# Altium PCB mux_lowside-V1_00.PcbDoc
Units mil, origin at the board's own origin, x right, y up, seen from the top; angles counter-clockwise.
Board outline 3937.01 x 3937.01 mil, 2 copper layers (Top Layer, Bottom Layer), stack 12.8 mil thick; 44 components, 90 nets, 270 pads, 149 vias.
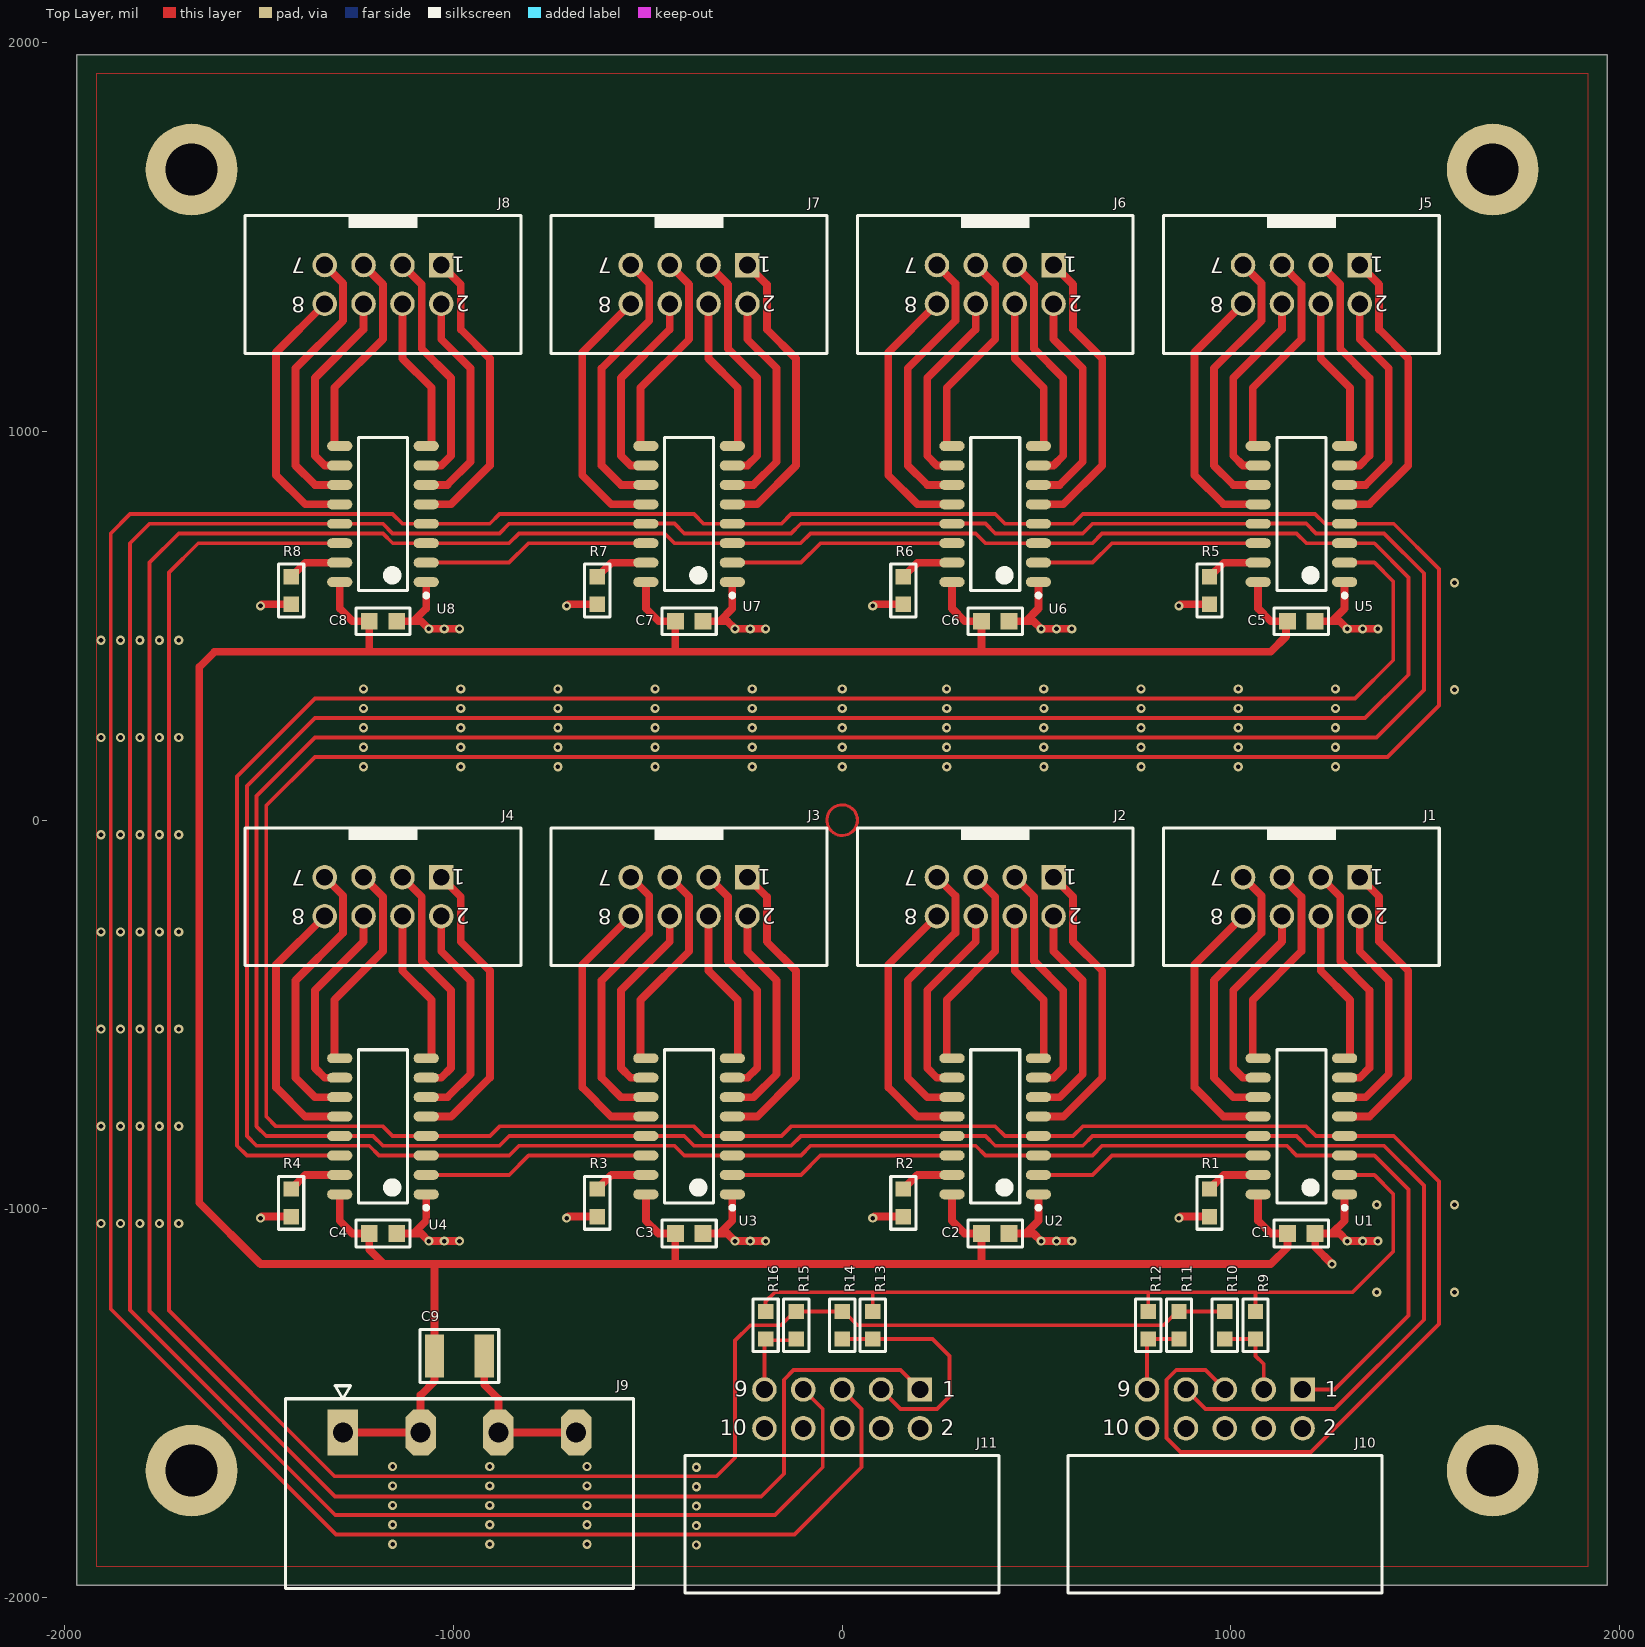
[diagram p0: Top Layer view]
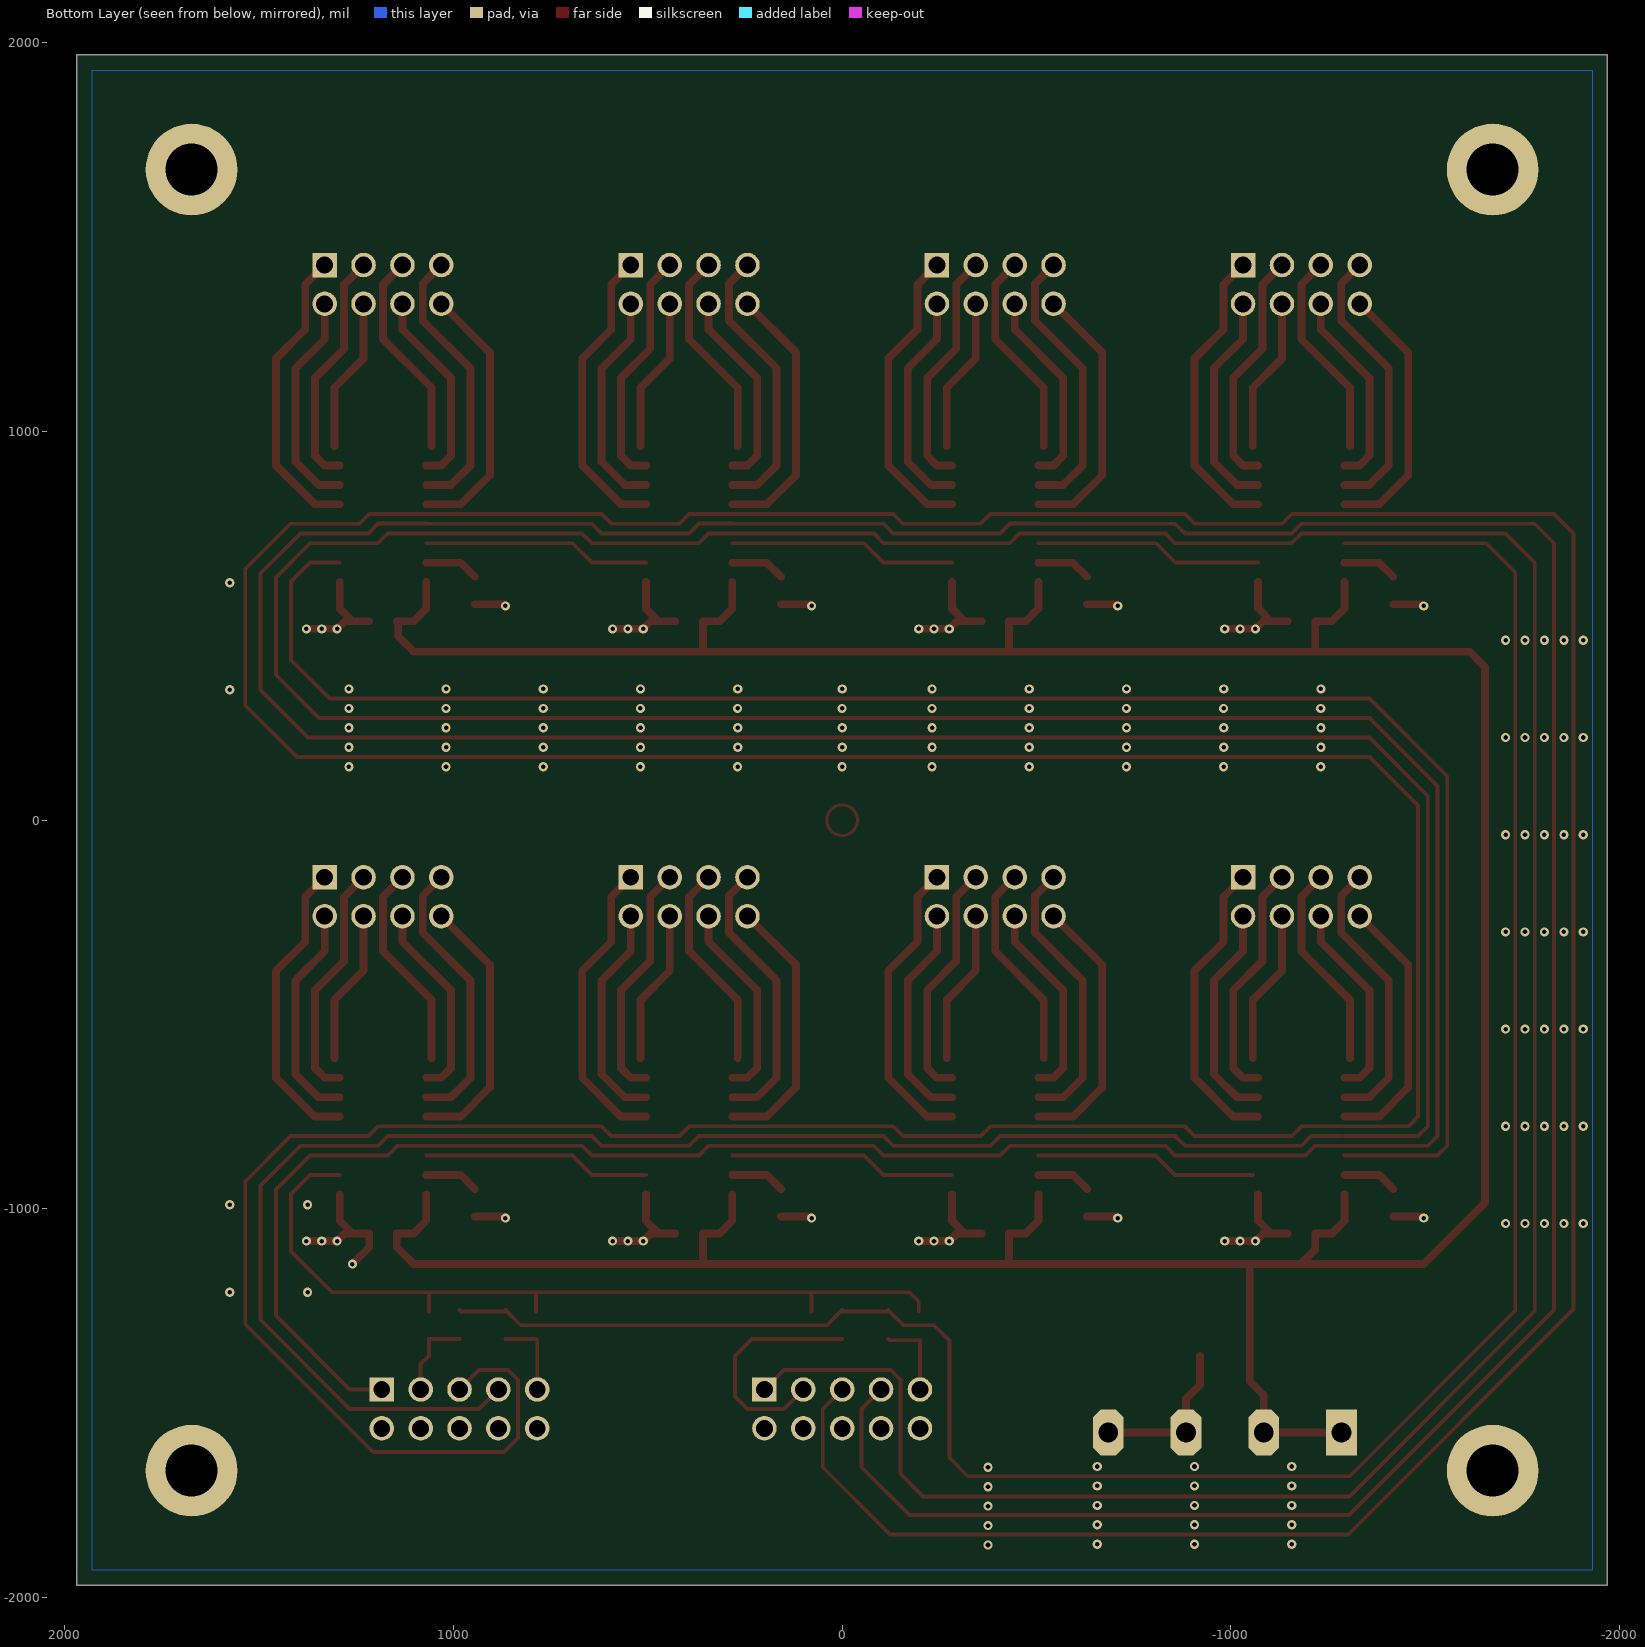
[diagram p1: Bottom Layer view, seen from below]
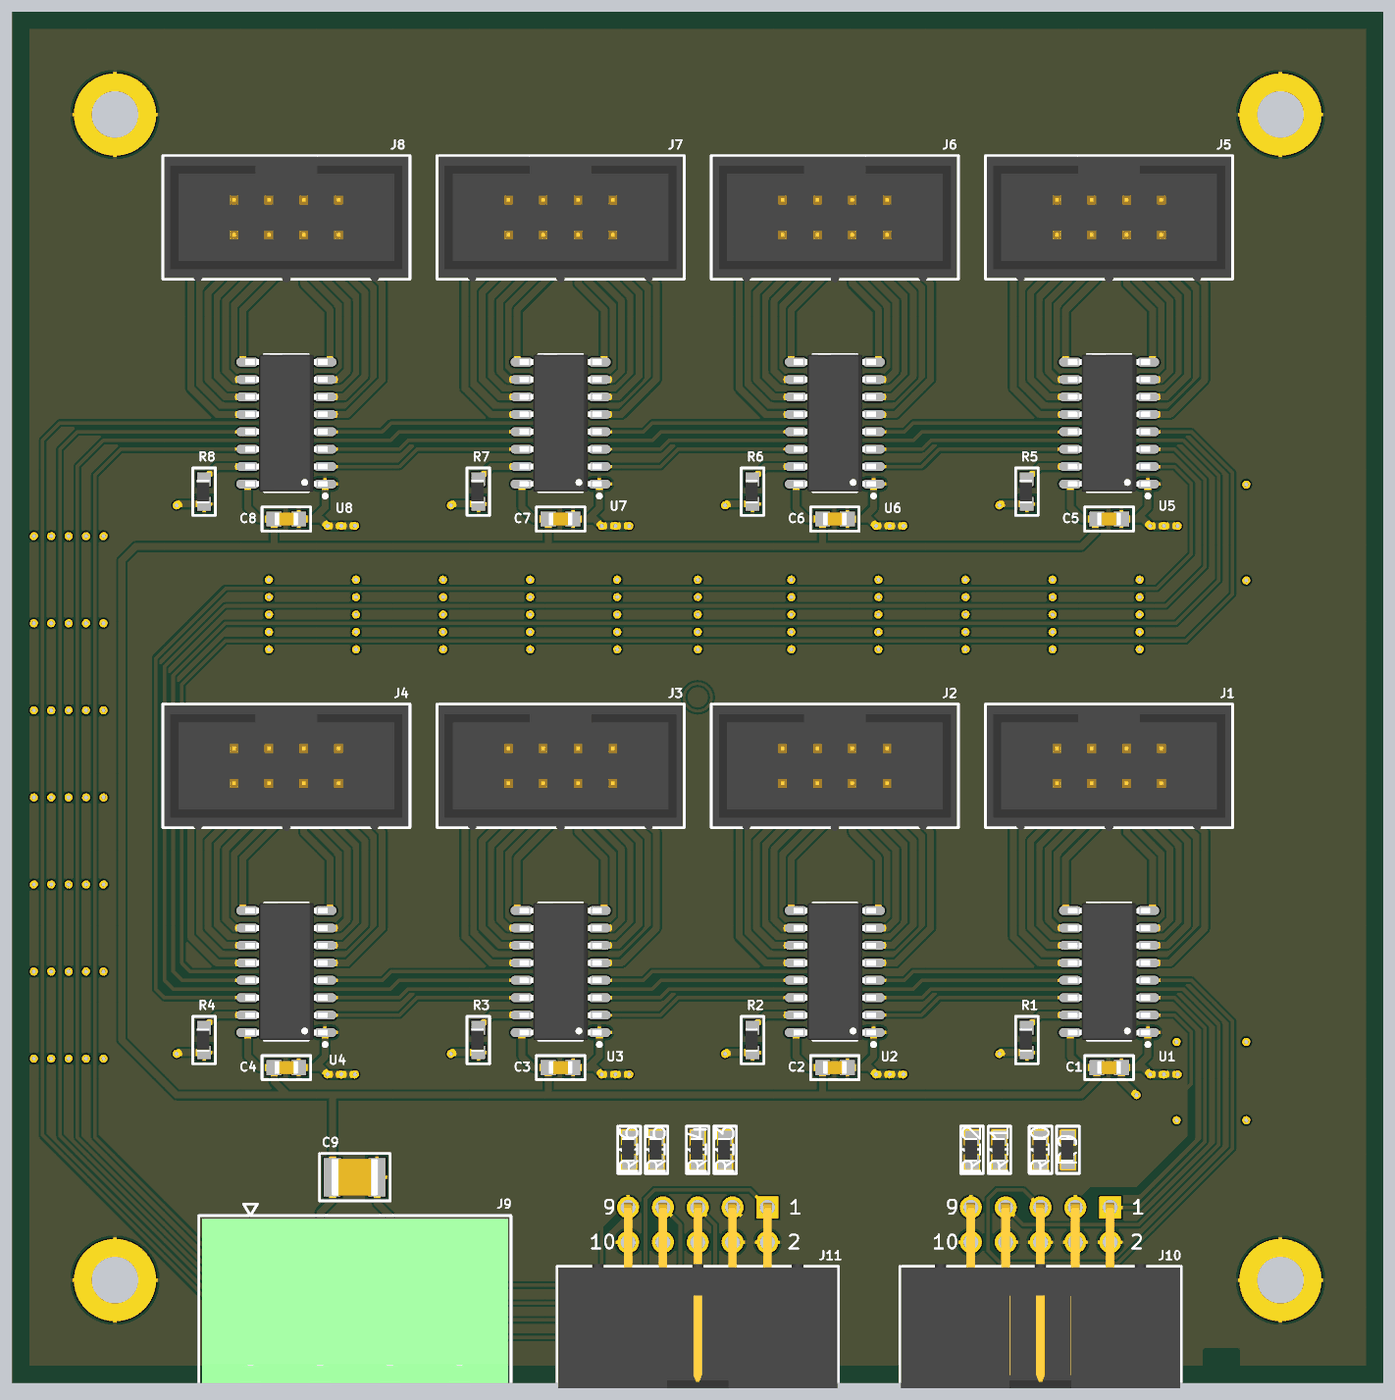
[diagram p2: 3D render of the assembled board from above, using the file's embedded part models]

## Layer stack, top to bottom
Top Solder: solder mask 0.4, Solder Resist, Dk 3.5
Top Layer: signal copper 1.4
Dielectric 1: core 10, FR-4, Dk 4.2
Bottom Layer: signal copper 1.4
Bottom Solder: solder mask 0.4, Solder Resist, Dk 3.5

## Board outline
-1968.5,-1968.5 -1968.5,1968.5 1968.5,1968.5 1968.5,-1968.5

## Design rules (kind name [scope] priority, off if disabled: settings)
Clearance [All] p1: gap=5.98 ignorepadtopadclearanceinfootprint=FALSE
ComponentClearance ComponentClearance_LayerNumbers [All vs TouchesRoom('LayerNumbers')] p1: gap=0 collisioncheckmode=3 verticalgap=0 showdistances=FALSE
ComponentClearance [All] p2: gap=10 collisioncheckmode=3 verticalgap=10 showdistances=FALSE
HoleSize [All] p1: absolutevalues=TRUE maxlimit=255.91 minlimit=11.81 maxpercent=80.000 minpercent=20.000
MinimumSolderMaskSliver [All] p1: minsoldermaskwidth=5.91
PlaneConnect [All] p1: pad.planeconnectstyle=Relief pad.reliefexpansion=20 pad.reliefentries=4 pad.reliefconductorwidth=10 pad.reliefairgap=10 via.planeconnectstyle=Direct via.reliefexpansion=20 via.reliefentries=4 via.reliefconductorwidth=10 via.reliefairgap=10
PolygonConnect [All] p1: thpad.connectstyle=Relief thpad.reliefconductorwidth=10 thpad.reliefentries=4 thpad.polygonreliefangle="90 Angle" thpad.airgapwidth=10 smdpad.connectstyle=Relief smdpad.reliefconductorwidth=10 smdpad.reliefentries=4 smdpad.polygonreliefangle="90 Angle" smdpad.airgapwidth=10 via.connectstyle=Direct via.reliefconductorwidth=10 via.reliefentries=4 via.polygonreliefangle="90 Angle" via.airgapwidth=10
RoutingVias [All] p1: holewidth=15.75 width=31.5 viastyle="Through Hole" minholewidth=11.81 minwidth=23.62 maxholewidth=64.96 maxwidth=49.21
SilkToSolderMaskClearance [IsPad] p1: minsilkscreentomaskgap=5.91 clearancetoexposedcopper=TRUE
SolderMaskExpansion [All] p1: expansion=4
UnRoutedNet [All] p1: checkbadconnections=TRUE
Width [All] p1: maxlimit=20 minlimit=6 preferedwidth=10
24 further rules are at their usual default settings.

## Components (designator, comment, footprint, x,y, rotation, side; value= is the part's Value field where it differs from the comment)
C1 "Capacitor" CAPC1608X10M_SILK 1181.1,-1062.99 r180 top
C2 "Capacitor" CAPC1608X10M_SILK 393.7,-1062.99 r180 top
C3 "Capacitor" CAPC1608X10M_SILK -393.7,-1062.99 r180 top
C4 "Capacitor" CAPC1608X10M_SILK -1181.1,-1062.99 r180 top
C5 "Capacitor" CAPC1608X10M_SILK 1181.1,511.81 r180 top
C6 "Capacitor" CAPC1608X10M_SILK 393.7,511.81 r180 top
C7 "Capacitor" CAPC1608X10M_SILK -393.7,511.81 r180 top
C8 "Capacitor" CAPC1608X10M_SILK -1181.1,511.81 r180 top
C9 "Capacitor" CAPC3225X17M_SILK -984.64,-1377.95 r180 top
J1 "Header" 61200821621 1181.1,-196.85 r180 top
J2 "Header" 61200821621 393.7,-196.85 r180 top
J3 "Header" 61200821621 -393.7,-196.85 r180 top
J4 "Header" 61200821621 -1181.1,-196.85 r180 top
J5 "Header" 61200821621 1181.1,1377.95 r180 top
J6 "Header" 61200821621 393.7,1377.95 r180 top
J7 "Header" 61200821621 -393.7,1377.95 r180 top
J8 "Header" 61200821621 -1181.1,1377.95 r180 top
J9 "MSTBA 2,5/ 4-G-5,08" 1757268 -984.25,-1732.28 r0 top
J10 "Header" 61201021721 984.25,-1811.02 r0 top
J11 "Header" 61201021721 0,-1811.02 r0 top
R1 "Resistor" RESC1608X06M_SILK 944.88,-984.25 r270 top value=330
R2 "Resistor" RESC1608X06M_SILK 157.48,-984.25 r270 top value=330
R3 "Resistor" RESC1608X06M_SILK -629.92,-984.25 r270 top value=330
R4 "Resistor" RESC1608X06M_SILK -1417.32,-984.25 r270 top value=330
R5 "Resistor" RESC1608X06M_SILK 944.88,590.55 r270 top value=330
R6 "Resistor" RESC1608X06M_SILK 157.48,590.55 r270 top value=330
R7 "Resistor" RESC1608X06M_SILK -629.92,590.55 r270 top value=330
R8 "Resistor" RESC1608X06M_SILK -1417.32,590.55 r270 top value=330
R9 "Resistor" RESC1608X06M_SILK 1062.99,-1299.21 r270 top value=0
R10 "Resistor" RESC1608X06M_SILK 984.25,-1299.21 r270 top value=0
R11 "Resistor" RESC1608X06M_SILK 866.14,-1299.21 r270 top value=0
R12 "Resistor" RESC1608X06M_SILK 787.4,-1299.21 r270 top value=0
R13 "Resistor" RESC1608X06M_SILK 78.74,-1299.21 r270 top value=0
R14 "Resistor" RESC1608X06M_SILK 0,-1299.21 r270 top value=0
R15 "Resistor" RESC1608X06M_SILK -118.11,-1299.21 r270 top value=0
R16 "Resistor" RESC1608X06M_SILK -196.85,-1299.21 r270 top value=0
U1 "TLC5916IDR" SOIC127P600X175-16M 1181.1,-787.4 r180 top
U2 "TLC5916IDR" SOIC127P600X175-16M 393.7,-787.4 r180 top
U3 "TLC5916IDR" SOIC127P600X175-16M -393.7,-787.4 r180 top
U4 "TLC5916IDR" SOIC127P600X175-16M -1181.1,-787.4 r180 top
U5 "TLC5916IDR" SOIC127P600X175-16M 1181.1,787.4 r180 top
U6 "TLC5916IDR" SOIC127P600X175-16M 393.7,787.4 r180 top
U7 "TLC5916IDR" SOIC127P600X175-16M -393.7,787.4 r180 top
U8 "TLC5916IDR" SOIC127P600X175-16M -1181.1,787.4 r180 top

## Footprints (in the part's own frame and the unit in brackets; to place one, negate y for a bottom-side part, rotate by r counter-clockwise, add the part's x,y. Pads: shape width x height; smd on the part's side, far side on the other; paste and mask are expansions set on the pad)
1757268 [mm] "MSTBA 2,5/ 4-G-5,08"
  rect 2x3 hole 1.3: 1(-7.62,4)
  oct 2x3 hole 1.3: 2(-2.54,4) 3(2.54,4) 4(7.62,4)
  silkscreen extent -11.38,-6.2 11.38,7.05, body extent -11.16,-6 11.16,6, height 8.65
61200821621 [mm] "8 pins, straight, gold plating"
  rect 1.6x1.6 hole 1.1: 1(-3.81,-1.27)
  round 1.6 hole 1.1: 2(-3.81,1.27) 3(-1.27,-1.27) 4(-1.27,1.27) 5(1.27,-1.27) 6(1.27,1.27) 7(3.81,-1.27) 8(3.81,1.27)
  silkscreen extent -9.01,-4.5 9.01,4.5, body extent -8.91,-4.42 8.91,4.75, height 9.13
61201021721 [mm] "10 pins, right angled, gold plating"
  rect 1.6x1.6 hole 1.1: 1(5.08,8.805)
  round 1.6 hole 1.1: 2(5.08,6.265) 3(2.54,8.805) 4(2.54,6.265) 5(0,8.805) 6(0,6.265) 7(-2.54,8.805) 8(-2.54,6.265) 9(-5.08,8.805) 10(-5.08,6.265)
  silkscreen extent -10.26,-4.5 10.26,4.5, body extent -10.18,-4.42 10.18,9.13, height 9.23
CAPC1608X10M_SILK [mm] "Capacitor 0603, low density, silk outline"
  rect 1.1x1.1 smd: 1(-0.9,0) 2(0.9,0)
  silkscreen extent -1.78,-0.87 1.78,0.87, body extent -0.87,-0.48 0.87,0.48, height 1
CAPC3225X17M_SILK [mm] "Capacitor 1210, low density, silk outline"
  rect 1.25x2.8 smd: 1(-1.625,0) 2(1.625,0)
  silkscreen extent -2.58,-1.73 2.58,1.73, body extent -1.7,-1.35 1.7,1.35, height 1.7
RESC1608X06M_SILK [mm] "Resistor 0603 Low Density, Silkscreen Outline"
  rect 1x1 smd: 1(-0.9,0) 2(0.9,0)
  silkscreen extent -1.73,-0.82 1.73,0.82, body extent -0.85,-0.52 0.85,0.38, height 0.55
SOIC127P600X175-16M [mm] "SOIC, 16-Leads, Body 9,90x3,90mm, Pitch 1,27mm, IPC Low Density"
  oval 1.65x0.65 smd: 1(-2.825,4.445) 2(-2.825,3.175) 3(-2.825,1.905) 4(-2.825,0.635) 5(-2.825,-0.635) 6(-2.825,-1.905) 7(-2.825,-3.175) 8(-2.825,-4.445) 9(2.825,-4.445) 10(2.825,-3.175) 11(2.825,-1.905) 12(2.825,-0.635) 13(2.825,0.635) 14(2.825,1.905) 15(2.825,3.175) 16(2.825,4.445)
  silkscreen extent -2.95,-5 1.6,5.44, body extent -3,-5 3,5, height 1.75

## Part data
C1 C2 C3 C4 C5 C6 C7 C8: library part 11026540, "CAP nF100   50V 0603 X7R 10%", Capacity=100nF, Manufacturer=Samsung, Manufacturer Number=CL10B104KB8NNNC, Max. Voltage=50V, package=0603, Temp. Range="-55 .. 125°C", Tolerance=10%, Part Number=11026540, Pin Count=2, RoHS=yes, SAP-Nr.=11026540, SMD=yes, Technology=X7R
C9: library part 10159411, "CAP uF  4.7 50V 1210 X7R 10%", Capacity=4.7uF, Manufacturer=Samsung, Manufacturer Number=CL21A475KPFNNNE, Max. Voltage=50V, package=1210, Temp. Range="-55 .. 125°C", Tolerance=10%, Part Number=10159411, Pin Count=2, RoHS=yes, SAP-Nr.=10159411, SMD=yes, Technology=X7R
J1 J2 J3 J4 J5 J6 J7 J8: library part 61200821621, "Box Header Male THT 2.54mm straight 8pos", Manufacturer=Wuerth, Max. Current=3A, Max. Voltage=250V, Supplier Part Number 1=732-5395-ND, Temp. Range="-40 to 125°C", Manufacturer Number=61200821621, Nr. of positions=8, Part Number=61200821621, Pin Count=8, RoHS=yes, SMD=no, Supplier 1=Digikey, Type="Header Male"
J9: "PCB Header, 2.54mm, angled, 4pol", Manufacturer="Phoenix Contact", Manufacturer Number=1757268, Max. Current=15A, Max. Voltage=250V, Supplier Part Number 1=277-1108-ND, Information=5.08mm, Nr. of positions=4, Part Number="MSTBA 2,5/ 4-G-5,08", Pin Count=4, RoHS=yes, SMD=No, Supplier 1=Digikey, Type=Connector
J10 J11: library part 61201021721, "Box Header Male THT 2.54mm angled 10pos", Manufacturer=Wuerth, Max. Current=3A, Max. Voltage=250V, Supplier Part Number 1=732-2098-ND, Temp. Range="-40 to 125°C", Manufacturer Number=61201021721, Nr. of positions=10, Part Number=61201021721, Pin Count=10, RoHS=yes, SMD=no, Supplier 1=Digikey, Type="Header Male"
R1 R2 R3 R4 R5 R6 R7 R8: library part RES_330_0603, "Resistor 330 1% 0603", Manufacturer=Yaego, Manufacturer Number=RC0603FR-07330RL, package=0603, Power Dissipation=100mW, Temp. Range="-50°C to 150°C", Tolerance=1%, Part Number=RES_330_0603, Pin Count=2, RoHS=yes, SMD=yes, Technology="thick film"
R9 R10 R11 R12 R13 R14 R15 R16: library part RES_0_0603, "Resistor 0 1% 0603", Manufacturer=Yaego, Manufacturer Number=RC0603JR-070RL, package=0603, Power Dissipation=100mW, Temp. Range="-50°C to 150°C", Tolerance=1%, Part Number=RES_0_0603, Pin Count=2, RoHS=yes, SMD=yes, Technology="thick film"
U1 U2 U3 U4 U5 U6 U7 U8: "TLC5916IDR 8 channel LED Const. Current Sink Driver", Manufacturer="Texas Instruments", package=SOIC-16, Supplier Part Number 1=296-22710-1-ND, Temp. Range=-40..+125°C, Information 1="8 Channel, serial input", Information 2="3-5V; 120mA", Manufacturer Number=TLC5916IDR, Part Number=TLC5916IDR, Pin Count=16, RoHS=yes, SMD=yes, Supplier 1=Digikey, Type=LED-Driver

## Free pads (board coordinates)
  round 236.22 hole 133.86: ""(-1673.23,-1673.23) ""(-1673.23,1673.23) ""(1673.23,-1673.23) ""(1673.23,1673.23)

## Via types
v1: diameter 23.62, hole 11.81, Top Layer to Bottom Layer, 149 vias

## Nets (pads, with @x,y where several pads share a name; then routed paths per layer and width w, separated by ;. In a path a pad name is that pad's centre, name@x,y a point inside that pad or via, vN(x,y) a via of type N, cw(c..) or ccw(c..) an arc to the next point about the centre after c; other vN are vias at no path point)
CLK: J10.1 J11.1 U1.3 U2.3 U3.3 U4.3 U5.3 U6.3 U7.3 U8.3 | length 15819.1
  Top Layer w10: J11.1 150,-1414.37 -125,-1414.37 -150,-1439.37 -150,-1681.1 -208.27,-1739.37 -1304.53,-1739.37 -1781.5,-1262.4 -1781.5,662.4 -1706.3,737.6 -1181.3,737.6 -1156.1,712.4 U8.3 -856.5,712.4 -831.3,737.6 -456.3,737.6 -431.1,712.4 U7.3 -106.69,712.4 -81.5,737.6 343.7,737.6 368.9,712.4 U6.3 643.5,712.4 668.7,737.6 1168.7,737.6 1193.9,712.4 U5.3 1368.7,712.4 1368.7,712.2 1456.69,624.21 1456.69,374.02 1345.28,262.6 -1356.3,262.6 -1531.3,87.6 -1531.3,-812.4 -1506.3,-837.4 -1216.54,-837.4 -1191.54,-862.4 U4.3 -856.3,-862.4 -831.3,-837.4 -431.3,-837.4 -406.3,-862.4 U3.3 -106.3,-862.4 -81.3,-837.4 343.7,-837.4 368.7,-862.4 U2.3 643.7,-862.4 668.7,-837.4 1143.7,-837.4 1168.7,-862.4 U1.3 1368.7,-862.4 1456.69,-950.39 1456.69,-1274.41 1266.73,-1464.37 J10.1
GND: C1.1 C2.1 C3.1 C4.1 C5.1 C6.1 C7.1 C8.1 C9.1 J9.3 J9.4 J10.2 J10.4 J10.6 J10.8 J10.10 J11.2 J11.4 J11.6 J11.8 J11.10 pad. R1.2 R2.2 R3.2 R4.2 R5.2 R6.2 R7.2 R8.2 U1.1 U2.1 U3.1 U4.1 U5.1 U6.1 U7.1 U8.1 | length 3723.3
  Top Layer w20: v1(-1496.07,-1023.63) -1492.13,-1019.68 R4.2 ; v1(-1496.07,551.18) -1492.12,555.12 R8.2 ; U4.1 -1069.88,-1030.51 -1102.36,-1062.99 ; U8.1 -1069.88,544.68 -1102.75,511.81 C8.1 -1102.36,511.81 -1082.67,511.81 v1(-1062.99,492.13) v1(-1023.62,492.13) v1(-984.25,492.13) ; v1(-984.25,-1082.68) v1(-1023.62,-1082.68) v1(-1062.99,-1082.68) -1082.67,-1063 -1102.36,-1063 ; C9.1 -920.67,-1451.77 -884.25,-1488.19 J9.3 J9.4 ; v1(-708.66,-1023.63) -704.72,-1019.68 R3.2 ; v1(-708.66,551.18) -704.72,555.12 R7.2 ; U3.1 -282.48,-1030.51 -314.96,-1062.99 ; U7.1 -282.48,544.49 -315.15,511.81 C7.1 -314.96,511.81 -295.27,511.81 v1(-275.59,492.13) v1(-236.22,492.13) v1(-196.85,492.13) ; v1(-196.85,-1082.68) v1(-236.22,-1082.68) v1(-275.59,-1082.68) -295.27,-1063 -314.96,-1063 ; v1(78.74,-1023.63) 82.68,-1019.68 R2.2 ; v1(78.74,551.18) 82.68,555.12 R6.2 ; C6.1 472.44,511.81 ; U2.1 504.92,-1030.51 472.44,-1062.99 ; U6.1 504.92,544.29 472.44,511.81 ; v1(590.55,-1082.68) v1(551.18,-1082.68) v1(511.81,-1082.68) 492.13,-1063 472.44,-1063 ; v1(590.55,492.13) v1(551.18,492.13) v1(511.81,492.13) 492.13,511.81 472.44,511.81 ; v1(866.14,-1023.63) 870.08,-1019.68 R1.2 ; v1(866.14,551.18) 870.08,555.12 R5.2 ; v1(1259.84,-1141.74) 1216.54,-1098.43 C1.1 ; U1.1 1292.32,-1030.51 1259.84,-1062.99 ; U5.1 1292.32,544.29 1259.85,511.81 C5.1 1259.84,511.81 1279.53,511.81 v1(1299.21,492.13) v1(1338.58,492.13) v1(1377.95,492.13) ; v1(1377.95,-1082.68) v1(1338.58,-1082.68) v1(1299.21,-1082.68) 1279.53,-1063 1259.84,-1063 ; -1102.36,-1063 C4.1 -1102.36,-1062.99 ; -314.96,-1063 C3.1 -314.96,-1062.99 ; 472.44,-1063 C2.1 472.44,-1062.99 ; C1.1 1259.84,-1063 ; C1.1 1259.84,-1062.99
  other v1: -375,-1864.37 -1156.3,-1862.4 -906.3,-1862.4 -656.3,-1862.4 -375,-1814.37 -1156.3,-1812.4 -906.3,-1812.4 -656.3,-1812.4 -375,-1764.37 -1156.3,-1762.4 -906.3,-1762.4 -656.3,-1762.4 -375,-1714.37 -1156.3,-1712.4 -906.3,-1712.4 -656.3,-1712.4 -375,-1664.37 -1156.3,-1662.4 -906.3,-1662.4 -656.3,-1662.4
LE: J10.5 J11.5 U1.4 U2.4 U3.4 U4.4 U5.4 U6.4 U7.4 U8.4 | length 16989.6
  Top Layer w10: J11.5 50,-1514.37 50,-1664.37 -123.03,-1837.4 -1301.57,-1837.4 -1881.3,-1257.68 -1881.3,737.6 -1831.3,787.6 -1156.5,787.6 -1131.3,762.4 U8.4 -906.5,762.4 -881.3,787.6 -381.5,787.6 -356.3,762.4 U7.4 -156.5,762.4 -131.5,787.4 393.7,787.4 418.7,762.4 U6.4 593.7,762.4 618.7,787.4 618.7,787.6 1216.54,787.6 1241.73,762.4 U5.4 1418.7,762.4 1535.43,645.67 1535.43,295.28 1402.76,162.6 -1356.3,162.6 -1481.3,37.6 -1481.3,-762.4 -1456.3,-787.4 -1181.3,-787.4 -1156.3,-812.4 U4.4 -906.3,-812.4 -881.3,-787.4 -381.3,-787.4 -356.3,-812.4 U3.4 -156.3,-812.4 -131.3,-787.4 393.7,-787.4 418.7,-812.4 U2.4 593.7,-812.4 618.7,-787.4 1193.7,-787.4 1218.7,-812.4 U1.4 1418.7,-812.4 1535.43,-929.13 1535.43,-1295.67 1206.1,-1625 869.88,-1625 834.25,-1589.37 834.25,-1439.37 859.25,-1414.37 934.25,-1414.37 J10.5
LED0: J1.1 U1.5 | length 772.5
  Top Layer w20: U1.5 1356.1,-762.4 1456.1,-662.4 1456.1,-387.4 1381.1,-312.4 1381.1,-196.85 J1.1
LED1: J1.2 U1.6 | length 575.7
  Top Layer w20: U1.6 1346.79,-712.4 1406.1,-653.09 1406.1,-412.4 1331.1,-337.4 J1.2
LED2: J1.3 U1.7 | length 616.5
  Top Layer w20: J1.3 1281.1,-196.85 1281.1,-362.4 1356.1,-437.4 1356.1,-637.4 1331.1,-662.4 U1.7
LED3: J1.4 U1.8 | length 396.6
  Top Layer w20: J1.4 1231.1,-387.4 1306.1,-462.4 U1.8@1306.1,-612.4
LED4: J1.5 U1.9 | length 547.5
  Top Layer w20: U1.9@1056.1,-612.4 1056.1,-462.4 1181.1,-337.4 1181.1,-196.85 J1.5 J1.5@1131.1,-137.4
LED5: J1.6 U1.10 | length 516.5
  Top Layer w20: U1.10 1031.1,-662.4 1006.1,-637.4 1006.1,-437.4 1131.1,-312.4 J1.6
LED6: J1.7 U1.11 | length 720.4
  Top Layer w20: J1.7 1078.58,-194.33 1078.58,-289.92 956.1,-412.4 956.1,-662.4 1006.1,-712.4 U1.11
LED7: J1.8 U1.12 | length 696.6
  Top Layer w20: J1.8@1031.1,-237.4 J1.8 906.1,-371.85 906.1,-687.4 981.1,-762.4 U1.12
LED8: J2.1 U2.5 | length 772.5
  Top Layer w20: U2.5 568.7,-762.4 668.7,-662.4 668.7,-387.4 593.7,-312.4 593.7,-196.85 J2.1
LED9: J2.2 U2.6 | length 575.7
  Top Layer w20: U2.6 559.39,-712.4 618.7,-653.09 618.7,-412.4 543.7,-337.4 J2.2
LED10: J2.3 U2.7 | length 616.5
  Top Layer w20: J2.3 493.7,-196.85 493.7,-362.4 568.7,-437.4 568.7,-637.4 543.7,-662.4 U2.7
LED11: J2.4 U2.8 | length 396.6
  Top Layer w20: J2.4 443.7,-387.4 518.7,-462.4 U2.8@518.7,-612.4
LED12: J2.5 U2.9 | length 547.5
  Top Layer w20: U2.9@268.7,-612.4 268.7,-462.4 393.7,-337.4 393.7,-196.85 J2.5 J2.5@343.7,-137.4
LED13: J2.6 U2.10 | length 516.5
  Top Layer w20: U2.10 243.7,-662.4 218.7,-637.4 218.7,-437.4 343.7,-312.4 J2.6
LED14: J2.7 U2.11 | length 720.4
  Top Layer w20: J2.7 291.18,-194.33 291.18,-289.92 168.7,-412.4 168.7,-662.4 218.7,-712.4 U2.11
LED15: J2.8 U2.12 | length 696.6
  Top Layer w20: J2.8@243.7,-237.4 J2.8 118.7,-371.85 118.7,-687.4 193.7,-762.4 U2.12
LED16: J3.1 U3.5 | length 772.5
  Top Layer w20: U3.5 -218.7,-762.4 -118.7,-662.4 -118.7,-387.4 -193.7,-312.4 -193.7,-196.85 J3.1
LED17: J3.2 U3.6 | length 575.7
  Top Layer w20: U3.6 -228.02,-712.4 -168.7,-653.09 -168.7,-412.4 -243.7,-337.4 J3.2
LED18: J3.3 U3.7 | length 616.5
  Top Layer w20: J3.3 -293.7,-196.85 -293.7,-362.4 -218.7,-437.4 -218.7,-637.4 -243.7,-662.4 U3.7
LED19: J3.4 U3.8 | length 396.6
  Top Layer w20: J3.4 -343.7,-387.4 -268.7,-462.4 U3.8@-268.7,-612.4
LED20: J3.5 U3.9 | length 547.5
  Top Layer w20: U3.9@-518.7,-612.4 -518.7,-462.4 -393.7,-337.4 -393.7,-196.85 J3.5 J3.5@-443.7,-137.4
LED21: J3.6 U3.10 | length 516.5
  Top Layer w20: U3.10 -543.7,-662.4 -568.7,-637.4 -568.7,-437.4 -443.7,-312.4 J3.6
LED22: J3.7 U3.11 | length 720.4
  Top Layer w20: J3.7 -496.22,-194.33 -496.22,-289.92 -618.7,-412.4 -618.7,-662.4 -568.7,-712.4 U3.11
LED23: J3.8 U3.12 | length 696.6
  Top Layer w20: J3.8@-543.7,-237.4 J3.8 -668.7,-371.85 -668.7,-687.4 -593.7,-762.4 U3.12
LED24: J4.1 U4.5 | length 772.5
  Top Layer w20: U4.5 -1006.1,-762.4 -906.1,-662.4 -906.1,-387.4 -981.1,-312.4 -981.1,-196.85 J4.1
LED25: J4.2 U4.6 | length 575.7
  Top Layer w20: U4.6 -1015.42,-712.4 -956.1,-653.09 -956.1,-412.4 -1031.1,-337.4 J4.2
LED26: J4.3 U4.7 | length 616.5
  Top Layer w20: J4.3 -1081.1,-196.85 -1081.1,-362.4 -1006.1,-437.4 -1006.1,-637.4 -1031.1,-662.4 U4.7
LED27: J4.4 U4.8 | length 396.6
  Top Layer w20: J4.4 -1131.1,-387.4 -1056.1,-462.4 U4.8@-1056.1,-612.4
LED28: J4.5 U4.9 | length 547.5
  Top Layer w20: U4.9@-1306.1,-612.4 -1306.1,-462.4 -1181.1,-337.4 -1181.1,-196.85 J4.5 J4.5@-1231.1,-137.4
LED29: J4.6 U4.10 | length 516.5
  Top Layer w20: U4.10 -1331.1,-662.4 -1356.1,-637.4 -1356.1,-437.4 -1231.1,-312.4 J4.6
LED30: J4.7 U4.11 | length 720.4
  Top Layer w20: J4.7 -1283.62,-194.33 -1283.62,-289.92 -1406.1,-412.4 -1406.1,-662.4 -1356.1,-712.4 U4.11
LED31: J4.8 U4.12 | length 696.6
  Top Layer w20: J4.8@-1331.1,-237.4 J4.8 -1456.1,-371.85 -1456.1,-687.4 -1381.1,-762.4 U4.12
LED32: J5.1 U5.5 | length 772.5
  Top Layer w20: U5.5 1356.1,812.4 1456.1,912.4 1456.1,1187.4 1381.1,1262.4 1381.1,1377.95 J5.1
LED33: J5.2 U5.6 | length 575.7
  Top Layer w20: U5.6 1346.79,862.4 1406.1,921.72 1406.1,1162.4 1331.1,1237.4 J5.2
LED34: J5.3 U5.7 | length 616.5
  Top Layer w20: J5.3 1281.1,1377.95 1281.1,1212.4 1356.1,1137.4 1356.1,937.4 1331.1,912.4 U5.7
LED35: J5.4 U5.8 | length 396.6
  Top Layer w20: J5.4 1231.1,1187.4 1306.1,1112.4 U5.8@1306.1,962.4
LED36: J5.5 U5.9 | length 547.5
  Top Layer w20: U5.9@1056.1,962.4 1056.1,1112.4 1181.1,1237.4 1181.1,1377.95 J5.5 J5.5@1131.1,1437.4
LED37: J5.6 U5.10 | length 516.5
  Top Layer w20: U5.10 1031.1,912.4 1006.1,937.4 1006.1,1137.4 1131.1,1262.4 J5.6
LED38: J5.7 U5.11 | length 720.4
  Top Layer w20: J5.7 1078.58,1380.47 1078.58,1284.88 956.1,1162.4 956.1,912.4 1006.1,862.4 U5.11
LED39: J5.8 U5.12 | length 696.6
  Top Layer w20: J5.8@1031.1,1337.4 J5.8 906.1,1202.95 906.1,887.4 981.1,812.4 U5.12
LED40: J6.1 U6.5 | length 772.5
  Top Layer w20: U6.5 568.7,812.4 668.7,912.4 668.7,1187.4 593.7,1262.4 593.7,1377.95 J6.1
LED41: J6.2 U6.6 | length 575.7
  Top Layer w20: U6.6 559.39,862.4 618.7,921.72 618.7,1162.4 543.7,1237.4 J6.2
LED42: J6.3 U6.7 | length 616.5
  Top Layer w20: J6.3 493.7,1377.95 493.7,1212.4 568.7,1137.4 568.7,937.4 543.7,912.4 U6.7
LED43: J6.4 U6.8 | length 396.6
  Top Layer w20: J6.4 443.7,1187.4 518.7,1112.4 U6.8@518.7,962.4
LED44: J6.5 U6.9 | length 547.5
  Top Layer w20: U6.9@268.7,962.4 268.7,1112.4 393.7,1237.4 393.7,1377.95 J6.5 J6.5@343.7,1437.4
LED45: J6.6 U6.10 | length 516.5
  Top Layer w20: U6.10 243.7,912.4 218.7,937.4 218.7,1137.4 343.7,1262.4 J6.6
LED46: J6.7 U6.11 | length 720.4
  Top Layer w20: J6.7 291.18,1380.47 291.18,1284.88 168.7,1162.4 168.7,912.4 218.7,862.4 U6.11
LED47: J6.8 U6.12 | length 696.6
  Top Layer w20: J6.8@243.7,1337.4 J6.8 118.7,1202.95 118.7,887.4 193.7,812.4 U6.12
LED48: J7.1 U7.5 | length 772.5
  Top Layer w20: U7.5 -218.7,812.4 -118.7,912.4 -118.7,1187.4 -193.7,1262.4 -193.7,1377.95 J7.1
LED49: J7.2 U7.6 | length 575.7
  Top Layer w20: U7.6 -228.02,862.4 -168.7,921.72 -168.7,1162.4 -243.7,1237.4 J7.2
LED50: J7.3 U7.7 | length 616.5
  Top Layer w20: J7.3 -293.7,1377.95 -293.7,1212.4 -218.7,1137.4 -218.7,937.4 -243.7,912.4 U7.7
LED51: J7.4 U7.8 | length 396.6
  Top Layer w20: J7.4 -343.7,1187.4 -268.7,1112.4 U7.8@-268.7,962.4
LED52: J7.5 U7.9 | length 547.5
  Top Layer w20: U7.9@-518.7,962.4 -518.7,1112.4 -393.7,1237.4 -393.7,1377.95 J7.5 J7.5@-443.7,1437.4
LED53: J7.6 U7.10 | length 516.5
  Top Layer w20: U7.10 -543.7,912.4 -568.7,937.4 -568.7,1137.4 -443.7,1262.4 J7.6
LED54: J7.7 U7.11 | length 720.4
  Top Layer w20: J7.7 -496.22,1380.47 -496.22,1284.88 -618.7,1162.4 -618.7,912.4 -568.7,862.4 U7.11
LED55: J7.8 U7.12 | length 696.6
  Top Layer w20: J7.8@-543.7,1337.4 J7.8 -668.7,1202.95 -668.7,887.4 -593.7,812.4 U7.12
LED56: J8.1 U8.5 | length 772.5
  Top Layer w20: U8.5 -1006.1,812.4 -906.1,912.4 -906.1,1187.4 -981.1,1262.4 -981.1,1377.95 J8.1
LED57: J8.2 U8.6 | length 575.7
  Top Layer w20: U8.6 -1015.42,862.4 -956.1,921.72 -956.1,1162.4 -1031.1,1237.4 J8.2
LED58: J8.3 U8.7 | length 616.5
  Top Layer w20: J8.3 -1081.1,1377.95 -1081.1,1212.4 -1006.1,1137.4 -1006.1,937.4 -1031.1,912.4 U8.7
LED59: J8.4 U8.8 | length 396.6
  Top Layer w20: J8.4 -1131.1,1187.4 -1056.1,1112.4 U8.8@-1056.1,962.4
LED60: J8.5 U8.9 | length 547.5
  Top Layer w20: U8.9@-1306.1,962.4 -1306.1,1112.4 -1181.1,1237.4 -1181.1,1377.95 J8.5 J8.5@-1231.1,1437.4
LED61: J8.6 U8.10 | length 516.5
  Top Layer w20: U8.10 -1331.1,912.4 -1356.1,937.4 -1356.1,1137.4 -1231.1,1262.4 J8.6
LED62: J8.7 U8.11 | length 720.4
  Top Layer w20: J8.7 -1283.62,1380.47 -1283.62,1284.88 -1406.1,1162.4 -1406.1,912.4 -1356.1,862.4 U8.11
LED63: J8.8 U8.12 | length 696.6
  Top Layer w20: J8.8@-1331.1,1337.4 J8.8 -1456.1,1202.95 -1456.1,887.4 -1381.1,812.4 U8.12
NetJ10_3: J10.3 R9.2 R10.2 | length 217.3
  Top Layer w10: R10.2 R9.2 1062.99,-1377.95 1084.25,-1399.21 J10.3
NetJ10_9: J10.9 R11.2 R12.2 | length 209.8
  Top Layer w10: J10.9 784.25,-1337.8 R12.2 R11.2
NetJ11_3: J11.3 R13.2 R14.2 | length 607.6
  Top Layer w10: R14.2 R13.2 232.28,-1334.65 275.59,-1377.95 275.59,-1482.48 243.7,-1514.37 150,-1514.37 J11.3
NetJ11_9: J11.9 R15.2 R16.2 | length 209.8
  Top Layer w10: J11.9 -200,-1337.8 -121.26,-1337.8 R15.2
NetR1_1: R1.1 U1.15 | length 140.1
  Top Layer w20: R1.1 981.3,-912.4 U1.15
NetR2_1: R2.1 U2.15 | length 140.1
  Top Layer w20: R2.1 193.9,-912.4 U2.15
NetR3_1: R3.1 U3.15 | length 140.1
  Top Layer w20: R3.1 -593.5,-912.4 U3.15
NetR4_1: R4.1 U4.15 | length 140.1
  Top Layer w20: R4.1 -1380.91,-912.4 U4.15
NetR5_1: R5.1 U5.15 | length 140.1
  Top Layer w20: R5.1 981.3,662.4 U5.15
NetR6_1: R6.1 U6.15 | length 140.1
  Top Layer w20: R6.1 193.9,662.4 U6.15
NetR7_1: R7.1 U7.15 | length 140.1
  Top Layer w20: R7.1 -593.5,662.4 U7.15
NetR8_1: R8.1 U8.15 | length 140.1
  Top Layer w20: R8.1 -1380.91,662.4 U8.15
NetU1_14: U1.14 U2.2 | length 585.7
  Top Layer w10: U2.2 643.7,-912.4 693.7,-862.4 U1.14
NetU2_14: U2.14 U3.2 | length 584.5
  Top Layer w10: U3.2@-281.3,-912.4 -106.3,-912.4 -56.3,-862.4 U2.14
NetU3_14: U3.14 U4.2 | length 572.1
  Top Layer w10: U4.2@-1056.3,-912.4 -856.3,-912.4 -806.3,-862.4 U3.14
NetU4_14: U4.14 U5.2 | length 4669.3
  Top Layer w10: U4.14 -1531.3,-862.4 -1556.3,-837.4 -1556.3,112.6 -1356.3,312.6 1318.7,312.6 1417.32,411.22 1417.32,613.78 1368.7,662.4 U5.2
NetU5_14: U5.14 U6.2 | length 585.7
  Top Layer w10: U6.2 643.9,662.4 693.7,712.2 868.7,712.2 868.9,712.4 U5.14
NetU6_14: U6.14 U7.2 | length 585.7
  Top Layer w10: U7.2 -106.1,662.4 -56.1,712.4 U6.14
NetU7_14: U7.14 U8.2 | length 585.7
  Top Layer w10: U8.2 -856.69,662.4 -806.69,712.4 U7.14
OE: J10.7 J11.7 U1.13 U2.13 U3.13 U4.13 U5.13 U6.13 U7.13 U8.13 | length 16161.7
  Top Layer w10: U4.13 -1481.3,-812.4 -1506.3,-787.4 -1506.3,62.6 -1356.3,212.6 1374.02,212.6 1496.06,334.65 1496.06,635.24 1393.7,737.6 1218.7,737.6 1193.7,762.6 1070.08,762.6 U5.13 643.7,762.4 618.9,737.6 393.7,737.6 368.7,762.6 282.68,762.6 U6.13 -106.5,762.4 -131.3,737.6 -406.3,737.6 -431.3,762.6 -504.72,762.6 U7.13 -856.5,762.4 -881.3,737.6 -1156.5,737.6 -1181.3,762.4 U8.13 -1781.3,762.4 -1831.3,712.4 -1831.3,-1260.04 -1303.94,-1787.4 -173.03,-1787.4 -50,-1664.37 -50,-1514.37 J11.7 ; U4.13@-1281.3,-812.4 -1206.3,-812.4 -1181.3,-837.4 -881.3,-837.4 -856.3,-812.4 U3.13 -406.3,-812.4 -381.3,-837.4 -131.3,-837.4 -106.3,-812.4 U2.13 368.7,-812.4 393.7,-837.4 618.7,-837.4 643.7,-812.4 U1.13 1168.7,-812.4 1193.7,-837.4 1393.7,-837.4 1496.06,-939.76 1496.06,-1285.04 1266.73,-1514.37 934.25,-1514.37 J10.7
SDI: R9.1 R12.1 R13.1 R16.1 U1.2 | length 2134.8
  Top Layer w10: R16.1 -196.85,-1238.19 -173.03,-1214.37 78.74,-1214.37 ; R13.1 78.74,-1214.37 ; R12.1 787.4,-1214.37 ; R9.1 1062.99,-1214.37 ; U1.2 1368.7,-912.4 1417.32,-961.02 1417.32,-1109.25 1312.2,-1214.37 1062.99,-1214.37 ; 78.74,-1214.37 787.4,-1214.37 ; 787.4,-1214.37 1062.99,-1214.37
SDO: R10.1 R11.1 R14.1 R15.1 U8.14 | length 5644.9
  Top Layer w10: U8.14 -1656.3,712.4 -1731.3,637.4 -1731.3,-1261.61 -1305.51,-1687.4 -323.03,-1687.4 -275.59,-1639.96 -275.59,-1539.37 ; -275.59,-1535.43 -275.59,-1338.58 -236.22,-1299.21 -157.48,-1299.21 -122.05,-1263.78 R15.1 ; R15.1@-118.11,-1259.84 -114.17,-1263.78 R14.1 ; R14.1@0,-1259.84 39.37,-1299.21 826.77,-1299.21 R11.1@866.14,-1259.84 ; R11.1 980.32,-1263.78 R10.1@984.25,-1259.84
VCC: C1.2 C2.2 C3.2 C4.2 C5.2 C6.2 C7.2 C8.2 C9.2 J9.1 J9.2 U1.16 U2.16 U3.16 U4.16 U5.16 U6.16 U7.16 U8.16 | length 9565.9
  Top Layer w20: U4.16 -1292.32,-1030.51 -1259.84,-1062.99 C4.2 -1216.54,-1104.33 -1179.13,-1141.73 ; U8.16 -1292.32,544.68 -1259.45,511.81 C8.2 -1216.54,437.01 -1220.48,433.07 ; J9.1 J9.2 -1084.25,-1478.74 -1048.62,-1443.11 C9.2 C9.2@-1048.62,-1377.56 ; C9.2@-1048.23,-1377.95 C9.2@-1048.62,-1377.56 ; U3.16 -504.92,-1030.51 -472.44,-1062.99 C3.2 -429.13,-1137.8 -433.07,-1141.73 ; U7.16 -504.92,544.68 -472.05,511.81 C7.2 -429.13,437.01 -433.07,433.07 ; U2.16 282.48,-1030.51 314.96,-1062.99 C2.2 358.27,-1137.8 ; U6.16 282.48,544.49 315.15,511.81 C6.2 358.27,437.01 354.33,433.07 ; U1.16 1069.88,-1030.51 1102.36,-1062.99 C1.2 1145.67,-1098.42 1102.36,-1141.73 358.27,-1141.73 358.27,-1137.8 ; U5.16 1069.88,544.29 1102.36,511.81 C5.2 ; C5.2@1141.73,511.81 1141.73,472.44 1102.36,433.07 354.33,433.07 ; -1220.48,433.07 -433.07,433.07 ; -1220.48,433.07 -1614.18,433.07 -1653.55,393.7 -1653.55,-984.26 -1496.07,-1141.73 -1179.13,-1141.73 ; -1179.13,-1141.73 -1048.23,-1141.73 ; C9.2@-1048.62,-1377.56 -1048.62,-1142.12 -1048.23,-1141.73 ; -1048.23,-1141.73 -433.07,-1141.73 ; -433.07,-1141.73 354.33,-1141.73 358.27,-1137.8 ; -433.07,433.07 354.33,433.07
copper on no net: | length 247.4
  Top Layer w7.87: 39.37,0 ccw(c0,0) 39.37,0
  other v1: 1375,-1214.37 1575,-1214.37 -1906.3,-1037.4 -1856.3,-1037.4 -1806.3,-1037.4 -1756.3,-1037.4 -1706.3,-1037.4 1375,-989.37 1575,-989.37 -1906.3,-787.4 -1856.3,-787.4 -1806.3,-787.4 -1756.3,-787.4 -1706.3,-787.4 -1906.3,-537.4 -1856.3,-537.4 -1806.3,-537.4 -1756.3,-537.4 -1706.3,-537.4 -1906.3,-287.4 -1856.3,-287.4 -1806.3,-287.4 -1756.3,-287.4 -1706.3,-287.4 -1906.3,-37.4 -1856.3,-37.4 -1806.3,-37.4 -1756.3,-37.4 -1706.3,-37.4 -1231.1,137.6 -981.1,137.6 -731.1,137.6 -481.1,137.6 -231.1,137.6 0.2,137.6 268.9,137.6 518.9,137.6 768.9,137.6 1018.9,137.6 1268.9,137.6 -1231.3,187.6 -981.3,187.6 -731.3,187.6 -481.3,187.6 -231.3,187.6 0,187.6 268.7,187.6 518.7,187.6 768.7,187.6 1018.7,187.6 1268.7,187.6 -1906.3,212.6 -1856.3,212.6 -1806.3,212.6 -1756.3,212.6 -1706.3,212.6 -1231.3,237.6 -981.3,237.6 -731.3,237.6 -481.3,237.6 -231.3,237.6 0,237.6 268.7,237.6 518.7,237.6 768.7,237.6 1018.7,237.6 1268.7,237.6 -1231.1,287.6 -981.1,287.6 -731.1,287.6 -481.1,287.6 -231.1,287.6 0.2,287.6 268.9,287.6 518.9,287.6 768.9,287.6 1018.9,287.6 1268.9,287.6 1575,335.63 -1231.3,337.6 -981.3,337.6 -731.3,337.6 -481.3,337.6 -231.3,337.6 0,337.6 268.7,337.6 518.7,337.6 768.7,337.6 1018.7,337.6 1268.7,337.6 -1906.3,462.6 -1856.3,462.6 -1806.3,462.6 -1756.3,462.6 -1706.3,462.6 1575,610.63

## Polygon pours and split planes (outlines as drawn)
GND on Bottom Layer "Bottom Layer-GND" (solid, shelved, pour order 0): -1929.13,-1929.13 1929.13,-1929.13 1929.13,1929.13 -1929.13,1929.13
GND on Top Layer "Top Layer-GND" (solid, shelved, pour order 2): -1919.09,-1919.29 1919.49,-1919.29 1919.49,1919.29 -1919.09,1919.29

## Silkscreen, mask and mechanical layers (free items; w line width, h text height)
Mechanical 1:
  the board outline again, w7.87

## Text inside footprints (layer, text, board x,y; h text height)
J1: Top Overlay "8" at 981.5,-228.35 h40 r180; Top Overlay "7" at 981.5,-128.35 h40 r180; Top Overlay "2" at 1404.33,-225.98 h40 r180; Top Overlay "1" at 1392.52,-125.98 h40 r180
J2: Top Overlay "8" at 194.09,-228.35 h40 r180; Top Overlay "7" at 194.09,-128.35 h40 r180; Top Overlay "2" at 616.93,-225.98 h40 r180; Top Overlay "1" at 605.12,-125.98 h40 r180
J3: Top Overlay "8" at -593.31,-228.35 h40 r180; Top Overlay "7" at -593.31,-128.35 h40 r180; Top Overlay "2" at -170.47,-225.98 h40 r180; Top Overlay "1" at -182.28,-125.98 h40 r180
J4: Top Overlay "8" at -1380.71,-228.35 h40 r180; Top Overlay "7" at -1380.71,-128.35 h40 r180; Top Overlay "2" at -957.87,-225.98 h40 r180; Top Overlay "1" at -969.69,-125.98 h40 r180
J5: Top Overlay "8" at 981.5,1346.46 h40 r180; Top Overlay "7" at 981.5,1446.46 h40 r180; Top Overlay "2" at 1404.33,1348.82 h40 r180; Top Overlay "1" at 1392.52,1448.82 h40 r180
J6: Top Overlay "8" at 194.09,1346.46 h40 r180; Top Overlay "7" at 194.09,1446.46 h40 r180; Top Overlay "2" at 616.93,1348.82 h40 r180; Top Overlay "1" at 605.12,1448.82 h40 r180
J7: Top Overlay "8" at -593.31,1346.46 h40 r180; Top Overlay "7" at -593.31,1446.46 h40 r180; Top Overlay "2" at -170.47,1348.82 h40 r180; Top Overlay "1" at -182.28,1448.82 h40 r180
J8: Top Overlay "8" at -1380.71,1346.46 h40 r180; Top Overlay "7" at -1380.71,1446.46 h40 r180; Top Overlay "2" at -957.87,1348.82 h40 r180; Top Overlay "1" at -969.69,1448.82 h40 r180
J10: Top Overlay "9" at 707.09,-1482.68 h40; Top Overlay "10" at 669.29,-1582.68 h40; Top Overlay "2" at 1237.8,-1582.68 h40; Top Overlay "1" at 1241.73,-1482.68 h40
J11: Top Overlay "9" at -277.17,-1482.68 h40; Top Overlay "10" at -314.96,-1582.68 h40; Top Overlay "2" at 253.54,-1582.68 h40; Top Overlay "1" at 257.48,-1482.68 h40